# Altium PCB PCB2.PcbDoc
Units mm, origin at the board's own origin, x right, y up, seen from the top; angles counter-clockwise.
Board outline 123 x 63 mm, 3 copper layers (Top Layer, Internal Plane 1, Bottom Layer), stack 0.427 mm thick; 32 components, 32 nets, 124 pads, 22 vias.
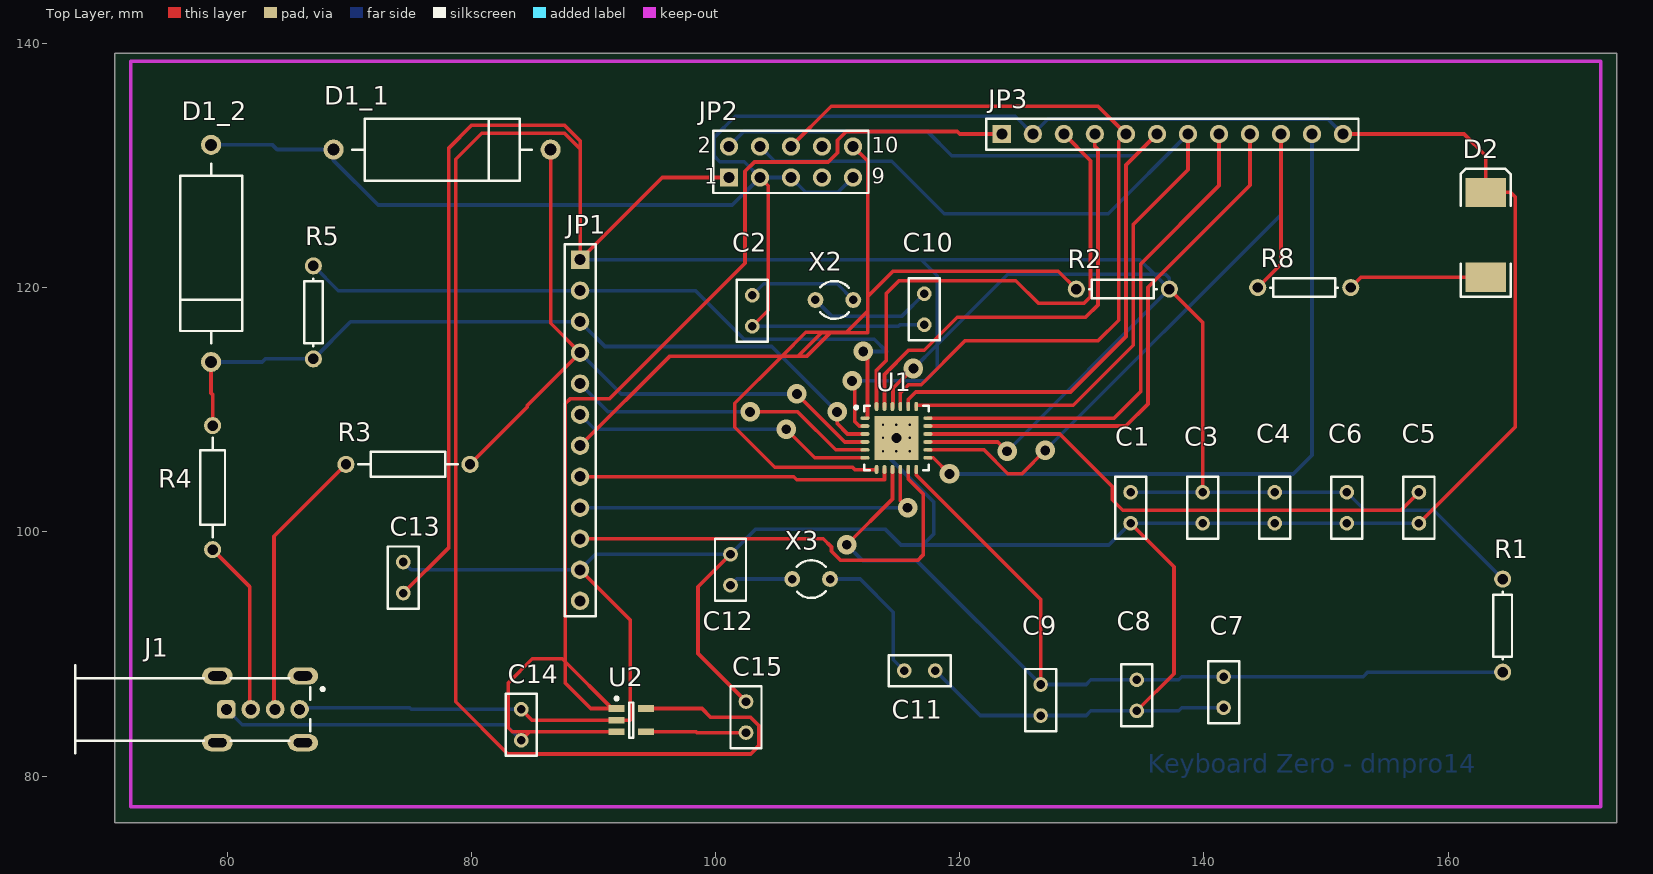
[diagram p0: Top Layer view]
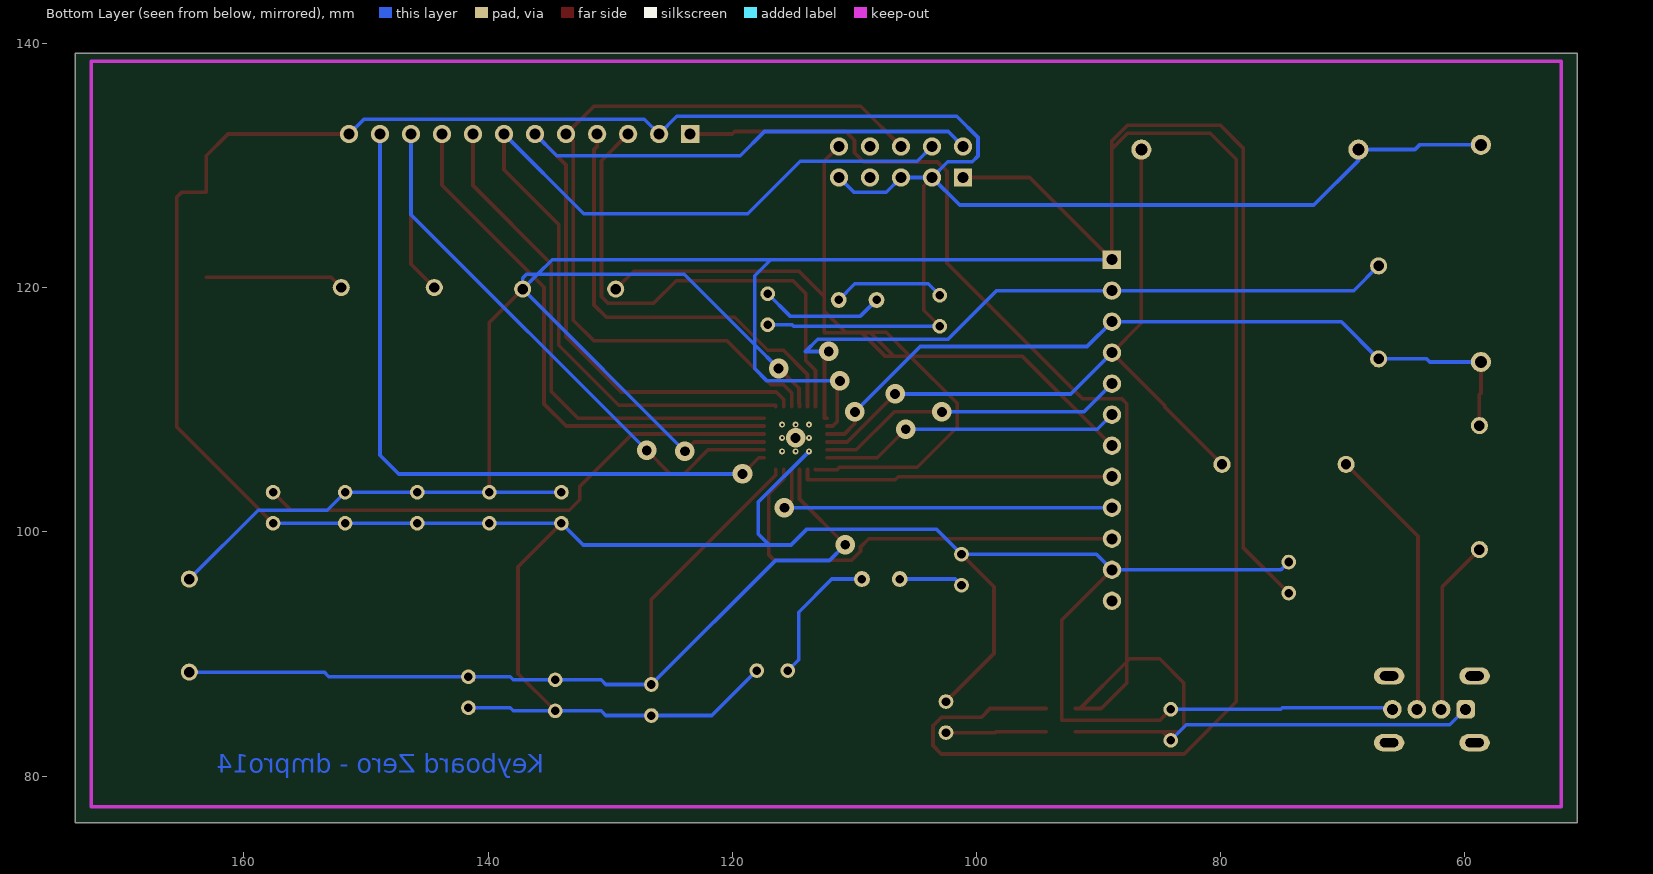
[diagram p1: Bottom Layer view, seen from below]
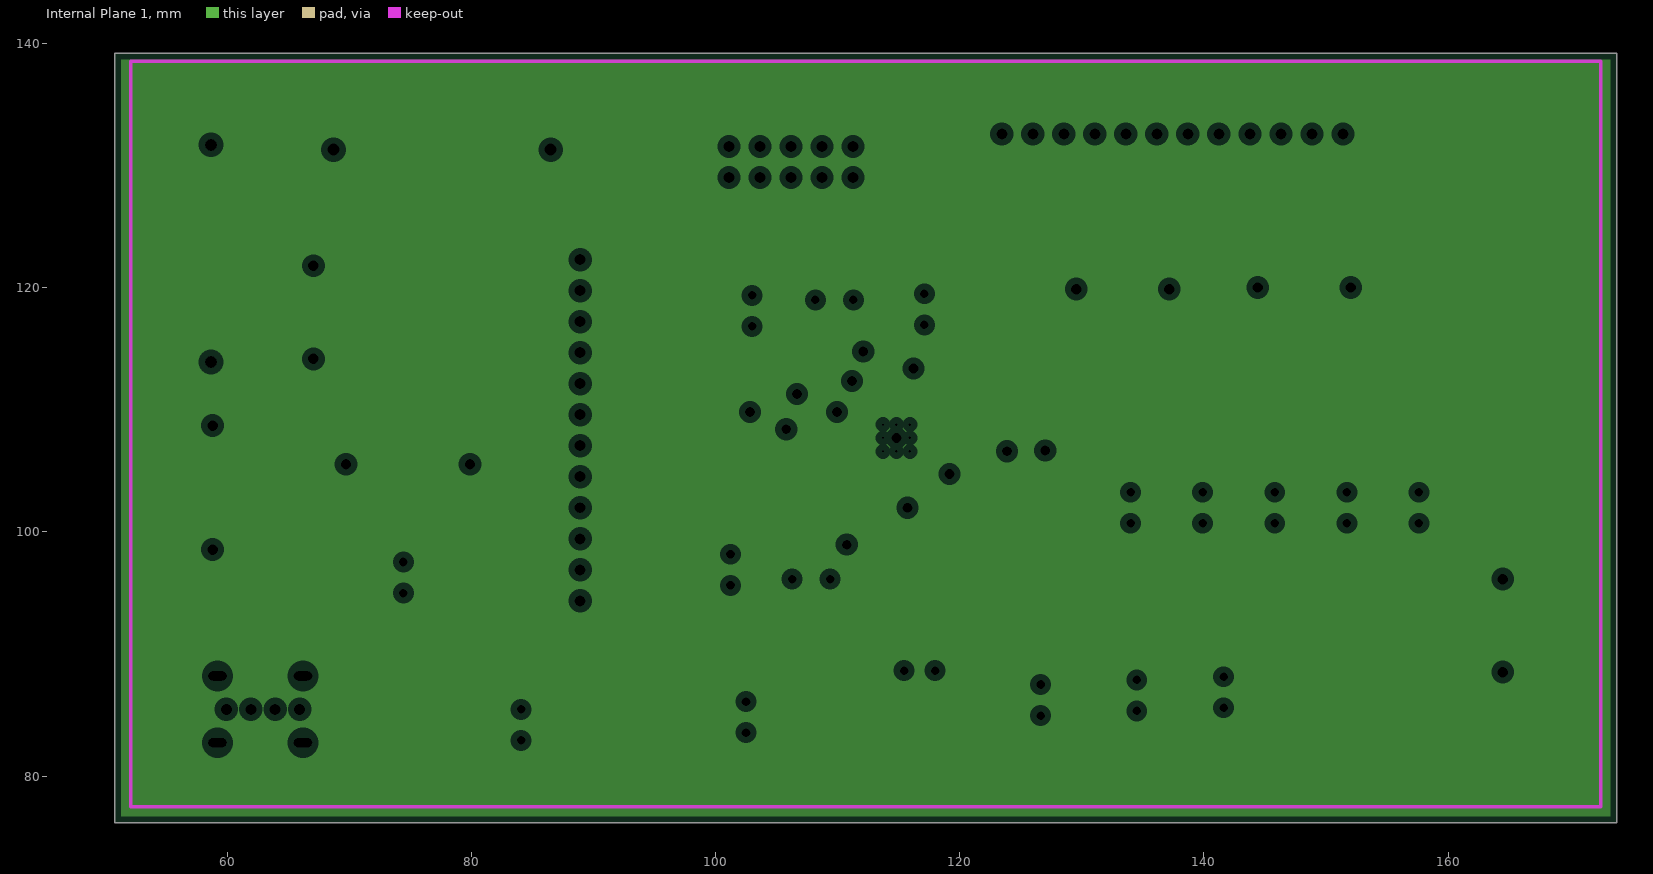
[diagram p2: Internal Plane 1, clearances drawn from the general rule]

## Layer stack, top to bottom
Top Solder: solder mask 0.0102, Solder Resist, Dk 3.5
Top Layer: signal copper 0.0356
Internal Plane 1: plane copper 0.0356
Dielectric 1: dielectric 0.32, FR-4, Dk 4.8
Bottom Layer: signal copper 0.0356
Bottom Solder: solder mask 0.0102, Solder Resist, Dk 3.5

## Board outline
50.8,76.2 173.8,76.2 173.8,139.2 50.8,139.2

## Design rules (kind name [scope] priority, off if disabled: settings)
Clearance [All] p1: gap=0.3
HoleToHoleClearance [All] p1: gap=0.01 allowstackedmicrovias=TRUE
NetAntennae NetAntennae_ENMR-QFN24_M [HasFootprint('ENMR-QFN24_M')] p1: netantennaetolerance=0
NetAntennae [All] p2: netantennaetolerance=0
PlaneClearance [All] p1: clearance=0.508
PlaneConnect [All] p1: planeconnectstyle=Relief reliefexpansion=0.508 reliefentries=4 reliefconductorwidth=0.254 reliefairgap=0.254
PolygonConnect [All] p1: connectstyle=Relief reliefconductorwidth=0.254 reliefentries=4 polygonreliefangle="90 Angle" airgapwidth=0.254
RoutingVias [All] p1: holewidth=0.8 width=1.6 viastyle="Through Hole" minholewidth=0.711 minwidth=1.27 maxholewidth=0.711 maxwidth=1.27
SilkToSolderMaskClearance SilkToSolderMaskClearance_ENMR-QFN24_M [IsPad vs HasFootprint('ENMR-QFN24_M')] p1: minsilkscreentomaskgap=0.1 clearancetoexposedcopper=TRUE
SilkToSolderMaskClearance SilkToSolderMaskClearance_MOLX-48204-0001_V [IsPad vs HasFootprint('MOLX-48204-0001_V')] p2: minsilkscreentomaskgap=0.1 clearancetoexposedcopper=TRUE
SilkToSolderMaskClearance [IsPad] p3: minsilkscreentomaskgap=0.254 clearancetoexposedcopper=TRUE
SolderMaskExpansion SolderMaskExpansion_HDR2X5 [HasFootprint('HDR2X5')] p1: expansion=0
SolderMaskExpansion SolderMaskExpansion_LT-S5-5-TSOT-23_N [HasFootprint('LT-S5-5-TSOT-23_N')] p2: expansion=0
SolderMaskExpansion [All] p3: expansion=0.102
UnpouredPolygon [All] p1: allowunpoured=FALSE
Width [All] p1: maxlimit=0.3 minlimit=0.3 preferedwidth=0.3
24 further rules are at their usual default settings.

## Components (designator, comment, footprint, x,y, rotation, side; value= is the part's Value field where it differs from the comment)
C1 "Cap" RAD-0.1 133.985,101.981 r90 top
C2 "Cap" RAD-0.1 102.997,118.11 r90 top
C3 "Cap" RAD-0.1 139.891,101.981 r90 top
C4 "Cap" RAD-0.1 145.796,101.981 r90 top
C5 "Cap" RAD-0.1 157.607,101.981 r90 top
C6 "Cap" RAD-0.1 151.701,101.981 r90 top
C7 "Cap" RAD-0.1 141.605,86.868 r90 top
C8 "Cap" RAD-0.1 134.493,86.614 r90 top
C9 "Cap" RAD-0.1 126.619,86.233 r90 top
C10 "Cap" RAD-0.1 117.094,118.237 r90 top
C11 "Cap" RAD-0.1 116.713,88.646 r180 top
C12 "Cap" RAD-0.1 101.219,96.901 r270 top
C13 "Cap" RAD-0.1 74.422,96.266 r270 top
C14 "Cap" RAD-0.1 84.074,84.201 r270 top
C15 "Cap" RAD-0.1 102.489,84.836 r270 top
D1_1 "D Zener" DIODE-0.7 77.597,131.318 r0 top
D1_2 "D Zener" DIODE-0.7 58.674,122.809 r270 top
D2 "Diode" SMC 163.068,124.333 r90 top
J1 "48204-0001" MOLX-48204-0001_V 52.197,85.471 r270 top
JP1 "Header 12" HDR1X12 88.9,122.301 r270 top
JP2 "Header 5X2" HDR2X5 101.092,129.032 r0 top
JP3 "Header 12" HDR1X12 123.444,132.588 r0 top
R1 "Res1 10K" AXIAL-0.3 164.465,92.329 r90 top
R2 "Res1" AXIAL-0.3 133.35,119.888 r0 top
R3 "USB SPEC" AXIAL-0.4 74.803,105.537 r0 top
R4 "USB SPEC" AXIAL-0.4 58.801,103.632 r90 top
R5 "1.5K" AXIAL-0.3 67.056,117.983 r90 top
R8 "390" AXIAL-0.3 148.209,120.015 r0 top
U1 "EFM32ZG108F16-QFN24" ENMR-QFN24_M 114.808,107.696 r0 top
U2 "LT1761ES5-3.3#TRMPBF" LT-S5-5-TSOT-23_N 93.091,84.582 r0 top
X2 "XTAL" R38 109.728,118.999 r90 top
X3 "XTAL" R38 107.823,96.139 r90 top

## Footprints (in the part's own frame and the unit in brackets; to place one, negate y for a bottom-side part, rotate by r counter-clockwise, add the part's x,y. Pads: shape width x height; smd on the part's side, far side on the other; paste and mask are expansions set on the pad)
AXIAL-0.3 [mm] "Axial Device, Thru-Hole; 2 Leads; 0.3 in Pin Spacing"
  round 1.4 hole 0.85: 1(-3.81,0) 2(3.81,0)
  silkscreen extent -2.77,-0.76 2.77,0.76
AXIAL-0.4 [mm] "Axial Device, Thru-Hole; 2 Leads; 0.4 in Pin Spacing"
  round 1.4 hole 0.85: 1(-5.08,0) 2(5.08,0)
  silkscreen extent -4.06,-1.02 4.06,1.02
DIODE-0.7 [mm] "Diode, Thru-Hole; 2 Leads; 0.7 in Pin Spacing"
  round 1.65 hole 1: 1(-8.89,0) 2(8.89,0)
  silkscreen extent -7.37,-2.54 7.37,2.54
ENMR-QFN24_M [mm] "QFN, 24-Leads, Body 5x5mm, Pitch 0.65mm, Thermal Pad 3.6 x 3.6mm, IPC Low Density"
  rect 3.6x3.6 smd: 0(0,0)
  oval 0.75x0.3 smd: 1(-2.575,1.625) 2(-2.575,0.975) 3(-2.575,0.325) 4(-2.575,-0.325) 5(-2.575,-0.975) 6(-2.575,-1.625) 13(2.575,-1.625) 14(2.575,-0.975) 15(2.575,-0.325) 16(2.575,0.325) 17(2.575,0.975) 18(2.575,1.625)
  oval 0.3x0.75 smd: 7(-1.625,-2.575) 8(-0.975,-2.575) 9(-0.325,-2.575) 10(0.325,-2.575) 11(0.975,-2.575) 12(1.625,-2.575) 19(1.625,2.575) 20(0.975,2.575) 21(0.325,2.575) 22(-0.325,2.575) 23(-0.975,2.575) 24(-1.625,2.575)
  silkscreen extent -3.42,-2.65 2.65,2.65, body extent -2.5,-2.5 2.5,2.5, height 0.9
HDR1X12 [mm] "Connector; Header; 12 Position"
  rect 1.5x1.5 hole 0.9: 1(0,0)
  round 1.5 hole 0.9: 2(2.54,0) 3(5.08,0) 4(7.62,0) 5(10.16,0) 6(12.7,0) 7(15.24,0) 8(17.78,0) 9(20.32,0) 10(22.86,0) 11(25.4,0) 12(27.94,0)
  silkscreen extent -1.27,-1.27 29.21,1.27
HDR2X5 [mm] "Connector; Header; 5x2 Position"
  rect 1.5x1.5 hole 0.9: 1(0,0)
  round 1.5 hole 0.9: 2(0,2.54) 3(2.54,0) 4(2.54,2.54) 5(5.08,0) 6(5.08,2.54) 7(7.62,0) 8(7.62,2.54) 9(10.16,0) 10(10.16,2.54)
  silkscreen extent -1.27,-1.27 11.43,3.81
LT-S5-5-TSOT-23_N [mm] "SOT23, 5-Leads, Body 2.90x1.63mm, Pitch 0.95mm, IPC Medium Density"
  rect 1.3x0.55 smd: 1(-1.2,0.95) 2(-1.2,0) 3(-1.2,-0.95) 4(1.2,-0.95) 5(1.2,0.95)
  silkscreen extent -1.32,-1.45 0.15,1.9, body extent -0.87,-1.45 0.87,1.45, height 1
MOLX-48204-0001_V [mm] "USB Type-A Up-Right Reverse Connector"
  rrect50% 1.52x1.52 hole 0.9: 1(0,7.73)
  round 1.52 hole 0.9: 2(0,9.73) 3(0,11.73) 4(0,13.73)
  oval 1.4x2.5 hole 0.75 slot 1.5 at 90 deg: MH1(-2.735,7) MH2(2.735,7) MH3(-2.735,14) MH4(2.735,14)
  silkscreen extent -3.6,-4.64 3.6,15.75, body extent -3.61,-4.71 3.59,14.54, height 14.68
R38 [mm] "Crystal, Thru-Hole; 2 Leads; Body 3.1 x 8.2 mm (Dia.xH)"
  round 1.3 hole 0.7: 1(0,1.55) 2(0,-1.55)
  silkscreen extent -1.55,-1.19 1.55,1.17
RAD-0.1 [mm] "Radial Cap, Thru-Hole; 2 Leads; 0.1 in Pin Spacing"
  round 1.2 hole 0.7: 1(-1.27,0) 2(1.27,0)
  silkscreen extent -2.54,-1.27 2.54,1.27
SMC [mm] "DO-214-AB/SMC; 2 C-Bend Leads; Body 7.9 x 5.9 mm, inc. leads (LxW)"
  rect 2.4x3.3 smd: 1(-3.475,0) 2(3.475,0)
  silkscreen extent -5.08,-2.05 5.42,2.06

## Part data
C1 C2 C3 C4 C5 C6 C7 C8 C9 C10 C11 C12 C13 C14 C15: "Capacitor"
D1_1 D1_2: "Zener Diode"
D2: "Default Diode"
J1: library part CMP-0411-00001-1, "USB Shielded I/O Receptacle, Type A"
JP1 JP3: "Header, 12-Pin"
JP2: "Header, 5-Pin, Dual row"
R1 R5 R8: library part Res1, "Resistor"
R2: "Resistor"
R3 R4: library part Res2, "Resistor"
U1: library part CMP-0270-00117-1, "EFM32 Zero Gecko, M0+ ARM Cortex CPU, 16 KB Flash, 4 KB RAM, 1.85 - 3.8 V Supply, 32 MHz Max Speed, -40 to 85 degC, 24-Pin QFN, RoHS Compliant"
U2: library part CMP-0476-01224-1, "100 mA, Low Noise, LDO Micropower Regulator, 1.8 to 20 V Vin, 3.3 V Vout, 5-pin SOT23 (S5-5), -40 to 125 degC, Pb-Free, Mini Tape and Reel"
X2 X3: "Crystal Oscillator"

## Via types
v1: diameter 1.6, hole 0.8, Top Layer to Bottom Layer, 13 vias
v2: diameter 0.5, hole 0.2, Top Layer to Bottom Layer, 9 vias

## Nets (pads, with @x,y where several pads share a name; then routed paths per layer and width w, separated by ;. In a path a pad name is that pad's centre, name@x,y a point inside that pad or via, vN(x,y) a via of type N, cw(c..) or ccw(c..) an arc to the next point about the centre after c; other vN are vias at no path point)
GND: C1.1 C2.1 C3.1 C4.1 C5.1 C6.1 C7.1 C8.1 C9.1 C10.1 C11.1 C12.1 C13.1 C14.1 C15.1 D1_1.1 D1_2.1 D2.2 J1.4 JP1.11 JP2.3 JP2.5 JP2.9 JP3.2 JP3.12 U1.0 U2.2 | length 389.1
  Top Layer w0.3: C14.1 84.963,84.582 U2.2 93.015,84.582 93.015,92.786 JP1.11 ; C12.1 98.552,95.504 98.552,90.043 C15.1 ; C2.1 104.318,118.161 104.318,128.346 JP2.3 ; C1.1 137.541,97.155 137.541,88.392 C8.1 ; JP3.12 161.29,132.588 163.068,130.81 D2.2 165.1,127.808 165.506,127.402 165.506,108.61 C5.1
  Bottom Layer w0.3: D1_2.1 63.703,131.699 64.084,131.318 D1_1.1 68.707,130.429 72.365,126.771 101.371,126.771 JP2.3 ; J1.4@65.83,85.598 74.955,85.598 75.082,85.471 C14.1 ; C13.1 75.057,96.901 JP1.11 90.17,98.171 C12.1 103.256,100.208 113.914,100.208 ; C2.1 114.971,116.84 115.098,116.967 C10.1 ; JP2.9 110.033,127.813 107.391,127.813 JP2.5 JP2.3 ; v2(113.708,106.596) 117.856,102.448 117.856,99.822 116.967,98.933 ; 114.816,99.306 113.914,100.208 ; C11.1 121.666,84.963 C9.1 130.353,84.963 130.734,85.344 C8.1 137.922,85.344 138.176,85.598 C7.1 ; JP3.12 150.165,133.807 127.203,133.807 JP3.2 124.536,134.036 101.6,134.036 99.873,132.309 99.873,130.785 100.33,130.327 102.337,130.327 JP2.3 ; C5.1 C6.1 C4.1 C3.1 C1.1 132.207,98.933 116.967,98.933 ; 113.914,100.208 115.189,98.933 116.967,98.933
  other v1: 114.808,107.696
  other v2: 114.808,106.596 115.908,106.596 113.708,107.696 114.808,107.696 115.908,107.696 113.708,108.796 114.808,108.796 115.908,108.796
NetC2_2: C2.2 X2.2 | length 9.2
  Bottom Layer w0.3: C2.2 103.937,120.32 109.957,120.32 X2.2
NetC5_2: C5.2 U1.16 | length 44.1
  Top Layer w0.3: U1.16 128.192,108.021 132.486,103.727 132.486,102.641 133.35,101.778 156.134,101.778 C5.2
NetC7_2: C7.2 C8.2 C9.2 R1.1 U1.9 U1.12 | length 88.4
  Top Layer w0.3: v1(110.744,98.958) 114.483,102.697 U1.9 ; U1.12 116.433,104.656 126.619,94.47 C9.2
  Bottom Layer w0.3: v1(110.744,98.958) 112.039,97.663 116.459,97.663 C9.2 130.353,87.503 130.734,87.884 C8.2 137.922,87.884 138.176,88.138 C7.2 153.035,88.138 153.416,88.519 R1.1
NetC10_2: C10.2 X2.1 | length 10.2
  Bottom Layer w0.3: X2.1 109.499,117.678 115.265,117.678 C10.2
NetC11_2: C11.2 X3.2 | length 11.5
  Bottom Layer w0.3: X3.2 111.836,96.139 114.554,93.421 114.554,89.535 C11.2
NetC12_2: C12.2 X3.1 | length 5.3
  Bottom Layer w0.3: C12.2 101.727,96.139 X3.1
NetC14_2: C14.2 J1.1 JP3.1 U2.1 U2.3 | length 128.1
  Top Layer w0.3: C14.2 84.775,83.632 ; U2.3 84.775,83.632 ; U2.1 U2.1@91.516,85.532 ; JP3.1 119.99,132.588 119.786,132.791 110.693,132.791 109.982,132.08 109.982,131.064 109.22,130.302 103.175,130.302 102.413,129.54 102.413,121.996 91.338,110.922 88.113,110.922 87.681,110.49 87.681,89.367 ; 84.775,83.632 83.348,83.632 83.007,83.972 83.007,87.63 84.988,89.611 87.437,89.611 87.681,89.367 ; 87.681,89.367 U2.1@91.516,85.532 ; 87.681,89.367 87.681,87.63 89.779,85.532 U2.1@91.516,85.532
  Bottom Layer w0.3: J1.1@59.83,85.598 61.227,84.201 82.804,84.201 C14.2
NetC15_2: C15.2 U2.4 | length 8.2
  Top Layer w0.3: U2.4 98.4,83.632 98.466,83.566 C15.2
NetD1_1_2: D1_1.2 JP1.4 R3.2 U1.4 | length 56.9
  Top Layer w0.3: R3.2 84.582,110.236 84.582,110.363 JP1.4 86.487,117.094 D1_1.2 ; v1(106.655,111.303) 110.586,107.371 U1.4
  Bottom Layer w0.3: JP1.4 92.278,111.303 v1(106.655,111.303)
NetD1_2_2: D1_2.2 JP1.3 R4.2 R5.1 U1.3 | length 64.6
  Top Layer w0.3: D1_2.2 58.674,111.379 58.801,111.252 R4.2 ; v1(109.951,109.83) 109.951,108.878 110.808,108.021 U1.3
  Bottom Layer w0.3: D1_2.2 62.865,113.919 63.119,114.173 R5.1 70.104,117.221 JP1.3 90.931,115.19 104.591,115.19 v1(109.951,109.83)
NetD2_1: D2.1 R8.2 | length 11.4
  Top Layer w0.3: R8.2 152.862,120.858 D2.1
NetJ1_2: J1.2 R4.1 | length 14.2
  Top Layer w0.3: R4.1 61.83,95.523 J1.2@61.83,85.598
NetJ1_3: J1.3 R3.1 | length 22.4
  Top Layer w0.3: J1.3@63.83,85.598 63.83,99.644 R3.1
NetJP1_2: JP1.2 R5.2 U1.1 | length 57.6
  Top Layer w0.3: v1(112.09,114.783) 112.446,114.427 112.446,109.321 U1.1
  Bottom Layer w0.3: R5.2 69.088,119.761 JP1.2 98.349,119.761 102.32,115.79 112.988,115.79 113.995,114.783 v1(112.09,114.783)
NetJP1_5: JP1.5 U1.5 | length 25.6
  Top Layer w0.3: v1(102.819,109.83) 106.727,109.83 109.836,106.721 U1.5
  Bottom Layer w0.3: JP1.5 91.211,109.83 v1(102.819,109.83)
NetJP1_6: JP1.6 U1.6 | length 24.8
  Top Layer w0.3: v1(105.791,108.407) 108.127,106.071 U1.6
  Bottom Layer w0.3: JP1.6 90.094,108.407 v1(105.791,108.407)
NetJP1_7: JP1.7 JP2.10 R2.1 U1.7 | length 94.2
  Top Layer w0.3: JP1.7 96.215,114.376 105.41,114.376 ; JP2.10 112.471,130.353 112.471,119.304 ; U1.7 113.183,105.105 111.404,105.105 111.208,105.302 104.847,105.302 101.569,108.58 101.569,110.535 105.41,114.376 ; R2.1 128.067,121.361 114.529,121.361 112.471,119.304 ; 105.41,114.376 107.391,116.357 110.719,116.357 112.471,118.11 ; 105.41,114.376 106.721,114.376 ; 106.721,114.376 108.646,116.301 109.378,116.301 ; 106.721,114.376 107.452,114.376 109.378,116.301 ; 109.378,116.301 112.415,116.301 112.471,116.357 112.471,118.11 ; 112.471,118.11 112.471,119.304
NetJP1_8: JP1.8 U1.8 | length 25.9
  Top Layer w0.3: JP1.8 106.401,104.521 106.655,104.267 113.833,104.267 U1.8
NetJP1_9: JP1.9 U1.10 | length 30.2
  Top Layer w0.3: U1.10 115.133,102.57 v1(115.722,101.981)
  Bottom Layer w0.3: JP1.9 v1(115.722,101.981)
NetJP1_10: JP1.10 U1.11 | length 36.7
  Top Layer w0.3: JP1.10 108.814,99.441 109.485,98.77 109.485,98.425 110.221,97.688 116.573,97.688 116.992,98.108 116.992,103.124 115.783,104.333 U1.11
NetJP1_12: JP1.12
NetJP2_2: JP2.2 JP3.6 U1.20 | length 75.3
  Top Layer w0.3: U1.20 115.783,110.843 116.4,111.461 129.063,111.461 133.61,116.008 133.61,130.054 JP3.6
  Bottom Layer w0.3: JP2.2 102.311,132.791 117.348,132.791 119.329,130.81 134.366,130.81 JP3.6
NetJP2_4: JP2.4 JP3.7 U1.19 | length 79.1
  Top Layer w0.3: U1.19 116.433,110.376 129.299,110.376 134.21,115.287 134.21,125.181 138.684,129.655 JP3.7
  Bottom Layer w0.3: JP2.4 104.851,130.353 114.427,130.353 118.72,126.06 132.156,126.06 JP3.7
NetJP2_6: JP2.6 JP3.5 U1.21 | length 66.7
  Top Layer w0.3: JP2.6 109.474,134.874 131.318,134.874 JP3.5 133.01,131.994 133.01,117.338 131.343,115.672 120.451,115.672 116.84,112.061 115.788,112.061 115.133,111.405 U1.21
NetJP3_3: JP3.3 U1.24 | length 42
  Top Layer w0.3: U1.24 113.183,113.246 113.975,114.038 113.975,119.538 115.011,120.574 124.587,120.574 126.441,118.72 130.175,118.72 130.708,119.253 130.708,130.404 JP3.3
NetJP3_4: JP3.4 U1.23 | length 36.6
  Top Layer w0.3: U1.23 113.833,112.901 115.804,114.871 117.09,114.871 119.795,117.577 130.302,117.577 131.318,118.593 131.318,131.318 131.064,131.572 JP3.4
NetJP3_8: JP3.8 U1.18 | length 42.1
  Top Layer w0.3: U1.18 132.638,109.321 134.81,111.493 134.81,121.954 141.224,128.368 JP3.8
NetJP3_9: JP3.9 U1.17 | length 44.3
  Top Layer w0.3: U1.17 133.597,108.671 135.41,110.484 135.41,120.05 143.764,128.404 JP3.9
NetJP3_10: JP3.10 R8.1 U1.14 | length 58.5
  Top Layer w0.3: U1.14 121.981,106.721 123.927,104.775 125.095,104.775 v1(127,106.68) ; R8.1 146.304,121.92 JP3.10
  Bottom Layer w0.3: v1(127,106.68) 146.304,125.984 JP3.10
NetJP3_11: JP3.11 U1.13 | length 59
  Top Layer w0.3: U1.13 117.835,106.071 v1(119.156,104.75)
  Bottom Layer w0.3: v1(119.156,104.75) 147.32,104.75 148.844,106.274 JP3.11
VDD: C1.2 C3.2 C4.2 C6.2 C13.2 JP1.1 JP2.1 R1.2 R2.2 U1.2 U1.15 U1.22 U2.5 | length 345.5
  Top Layer w0.3: C13.2 78.156,98.73 78.156,131.445 80.01,133.299 87.63,133.299 88.9,132.029 88.9,131.394 ; U2.5 98.882,85.532 99.604,84.811 102.87,84.811 103.556,84.125 103.556,82.499 102.87,81.813 82.982,81.813 78.715,86.081 78.715,130.531 80.848,132.664 87.63,132.664 88.9,131.394 ; JP2.1 95.631,129.032 JP1.1 88.9,131.394 ; v1(111.176,112.37) 111.408,112.137 111.408,109.023 111.76,108.671 U1.2 ; U1.22 114.483,110.49 114.533,110.54 114.533,111.76 116.159,113.386 v1(116.205,113.386) ; U1.15 123.109,107.371 v1(123.876,106.604) ; R2.2 139.891,117.157 C3.2
  Bottom Layer w0.3: JP1.1 116.84,122.301 ; v1(111.176,112.37) 117.145,112.37 118.161,113.386 118.161,115.341 ; v1(116.205,113.386) 118.161,115.341 ; v1(123.876,106.604) R2.2 ; C1.2 C3.2 C4.2 C6.2 153.175,101.778 158.826,101.778 R1.2 ; 116.84,122.301 118.161,120.98 118.161,115.341 ; 116.84,122.301 134.747,122.301 135.941,121.107 ; 118.161,115.341 123.927,121.107 135.941,121.107 ; 135.941,121.107 R2.2 ; 135.941,121.107 136.843,121.107 137.16,120.79 R2.2
pads on no net: J1.MH1 J1.MH2 J1.MH3 J1.MH4 JP2.7 JP2.8

## Keep-outs
Keep-Out Layer:
  lines w0.3: 52.1,77.5 172.5,77.5 172.5,138.557 52.1,138.557 52.1,77.5

## Other copper
Bottom Layer:
  text "Keyboard Zero - dmpro14" at 135.382,80.264 h1.52

## Text inside footprints (layer, text, board x,y; h text height)
J1: Mechanical 1 "PCB Edge" at 52.497,86.971 h0.4 r270
JP2: Top Overlay "2" at 98.552,131.064 h1.27; Top Overlay "1" at 99.06,128.524 h1.27; Top Overlay "9" at 112.776,128.524 h1.27; Top Overlay "10" at 112.776,131.064 h1.27